# Altium PCB VECTOR.PcbDoc (part 1 of 2)
Units mm, origin at the board's own origin, x right, y up, seen from the top; angles counter-clockwise.
Board outline 152.4 x 101.6 mm, 4 copper layers (Top Layer, VCC, Ground, Bottom Layer), stack 0.778 mm thick; 115 components, 252 nets, 1062 pads, 87 vias.
Unrouted connection lines stored in the file: 78.
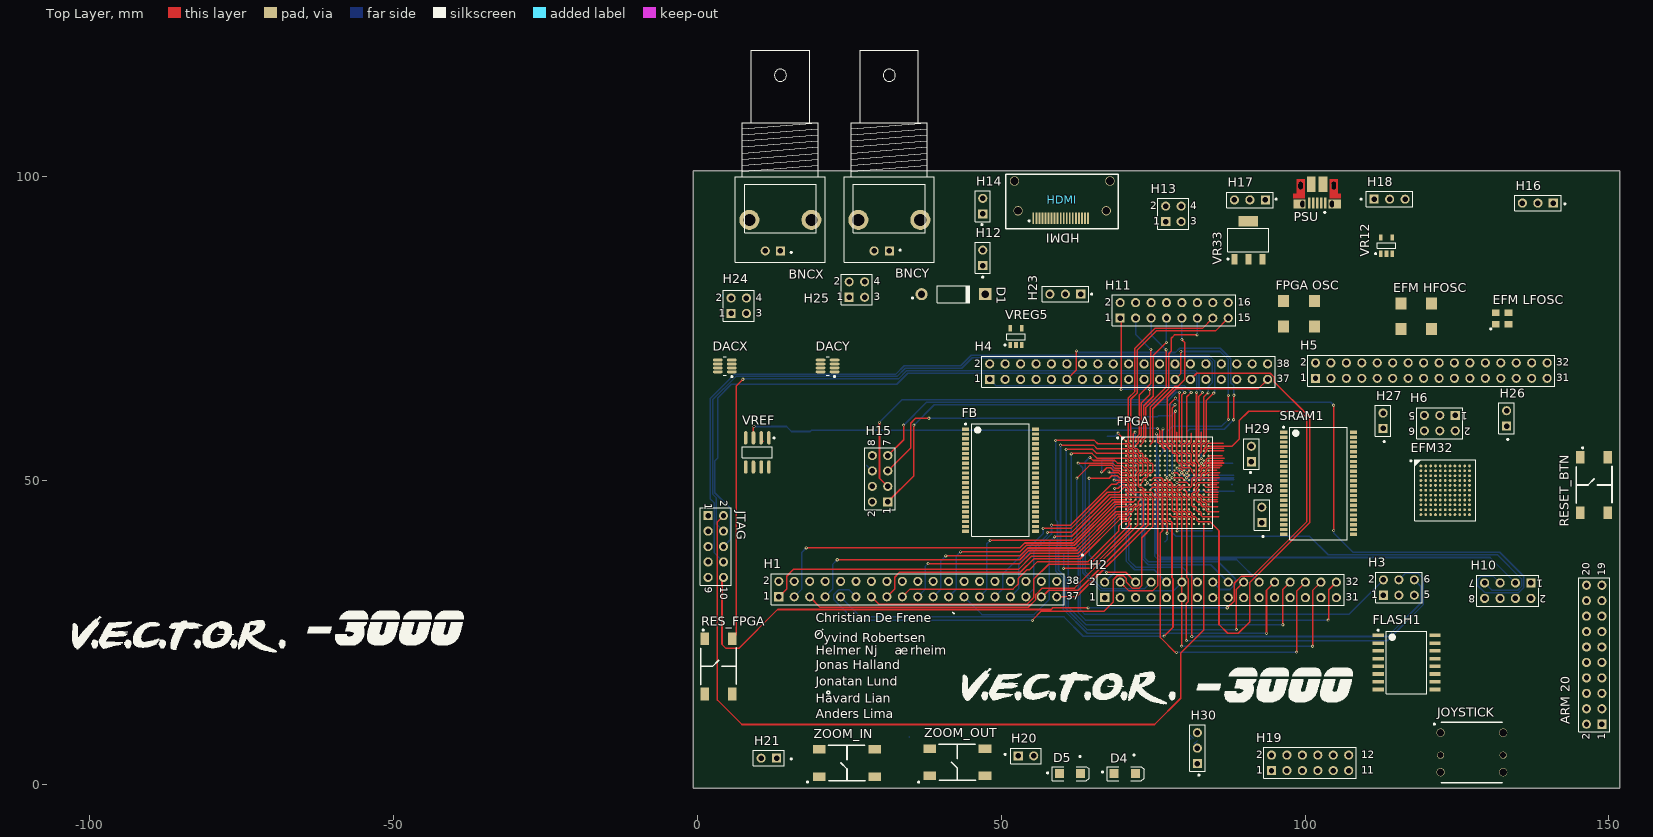
[diagram p0: Top Layer view]
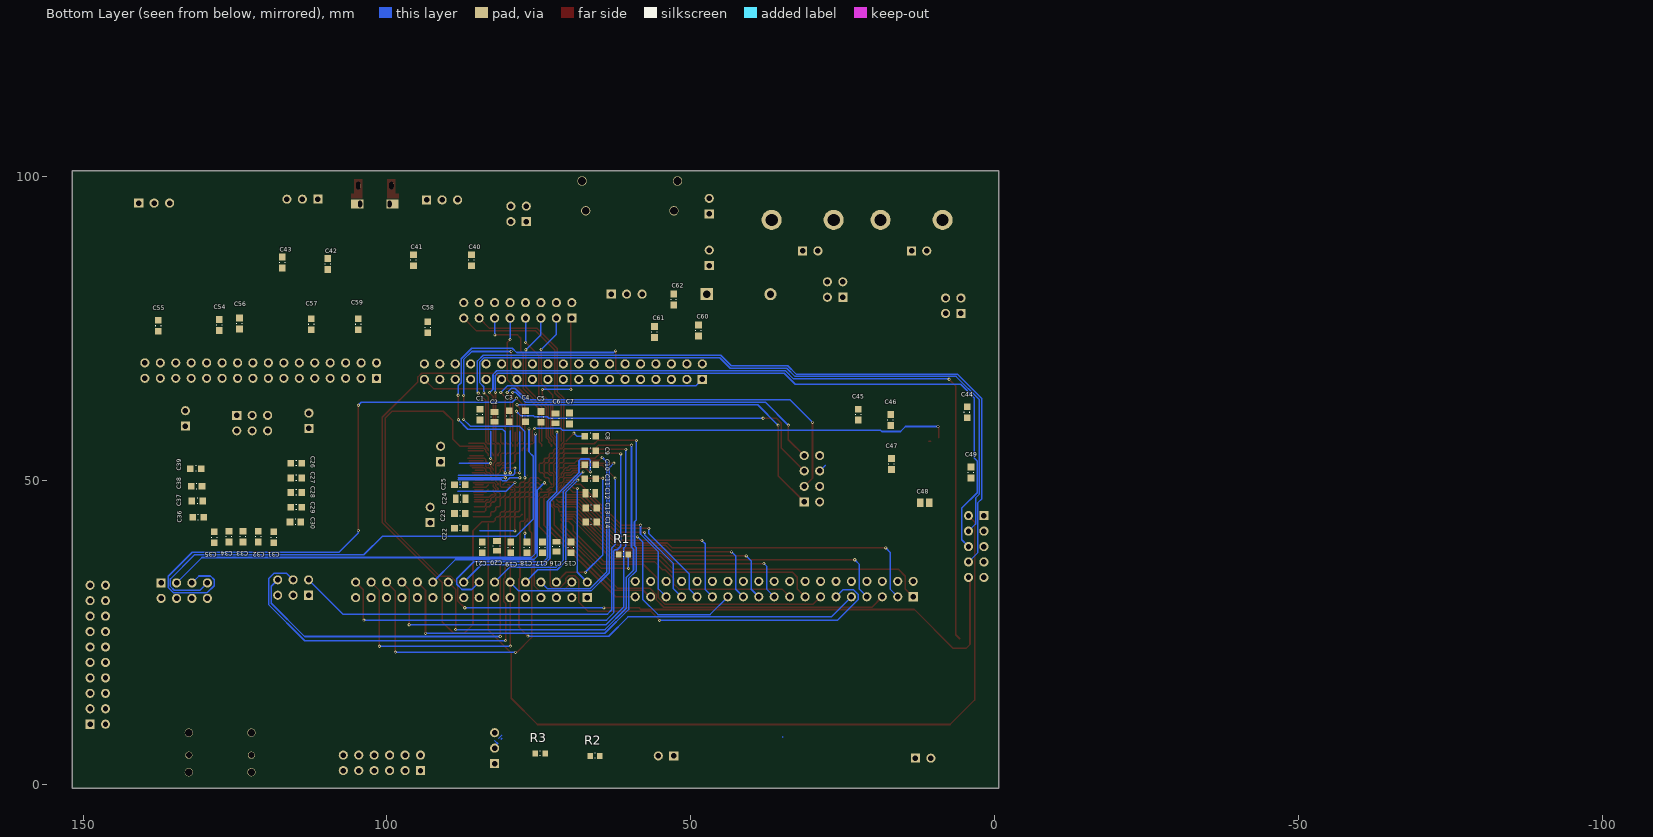
[diagram p1: Bottom Layer view, seen from below]
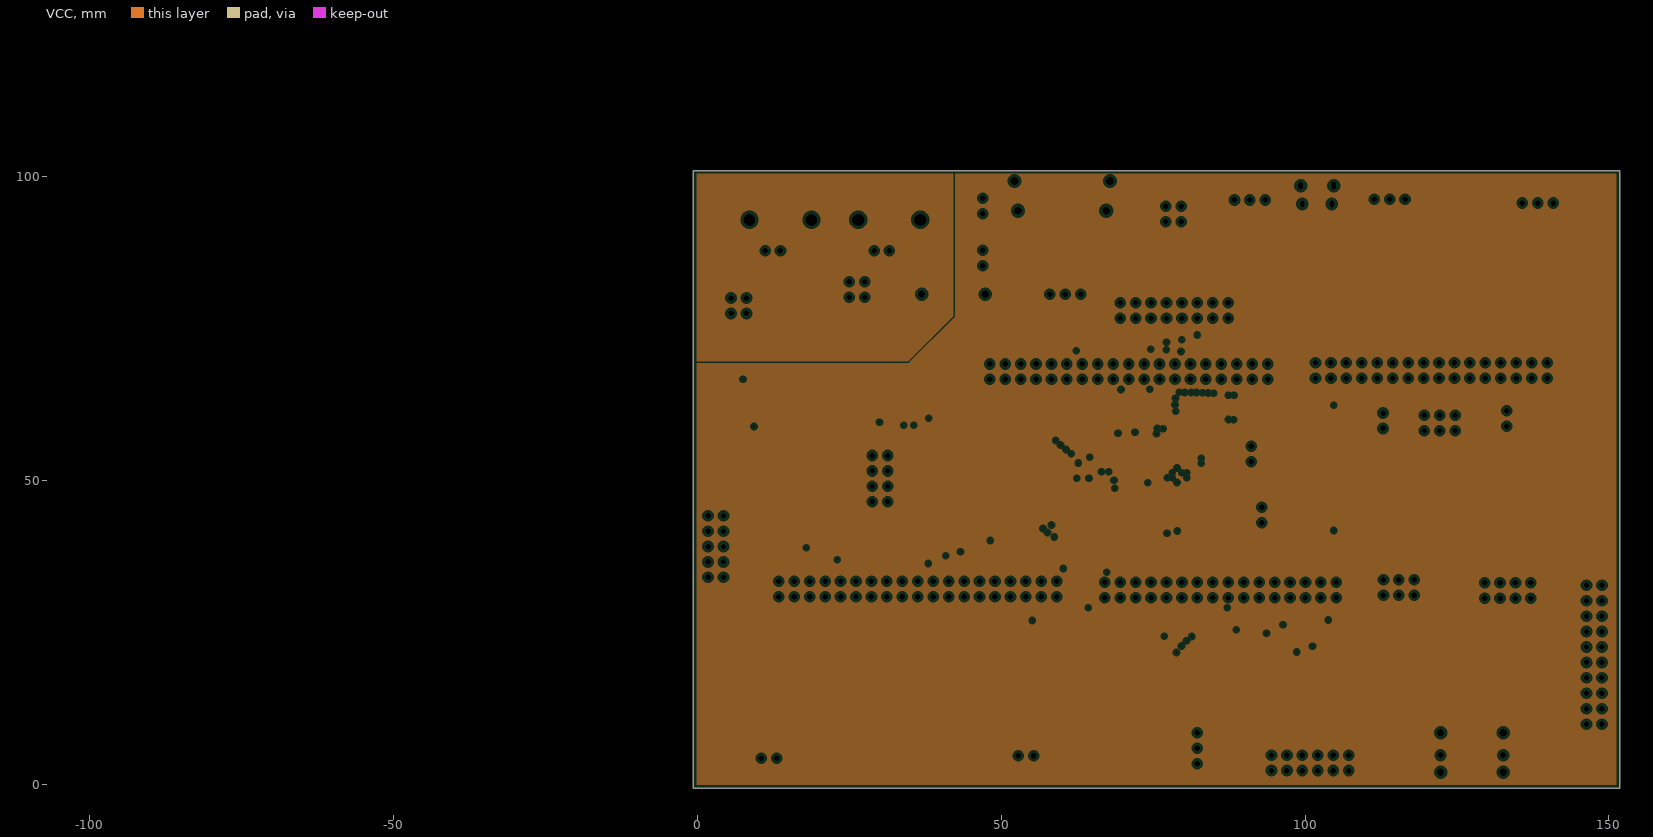
[diagram p2: VCC, clearances drawn from the general rule]
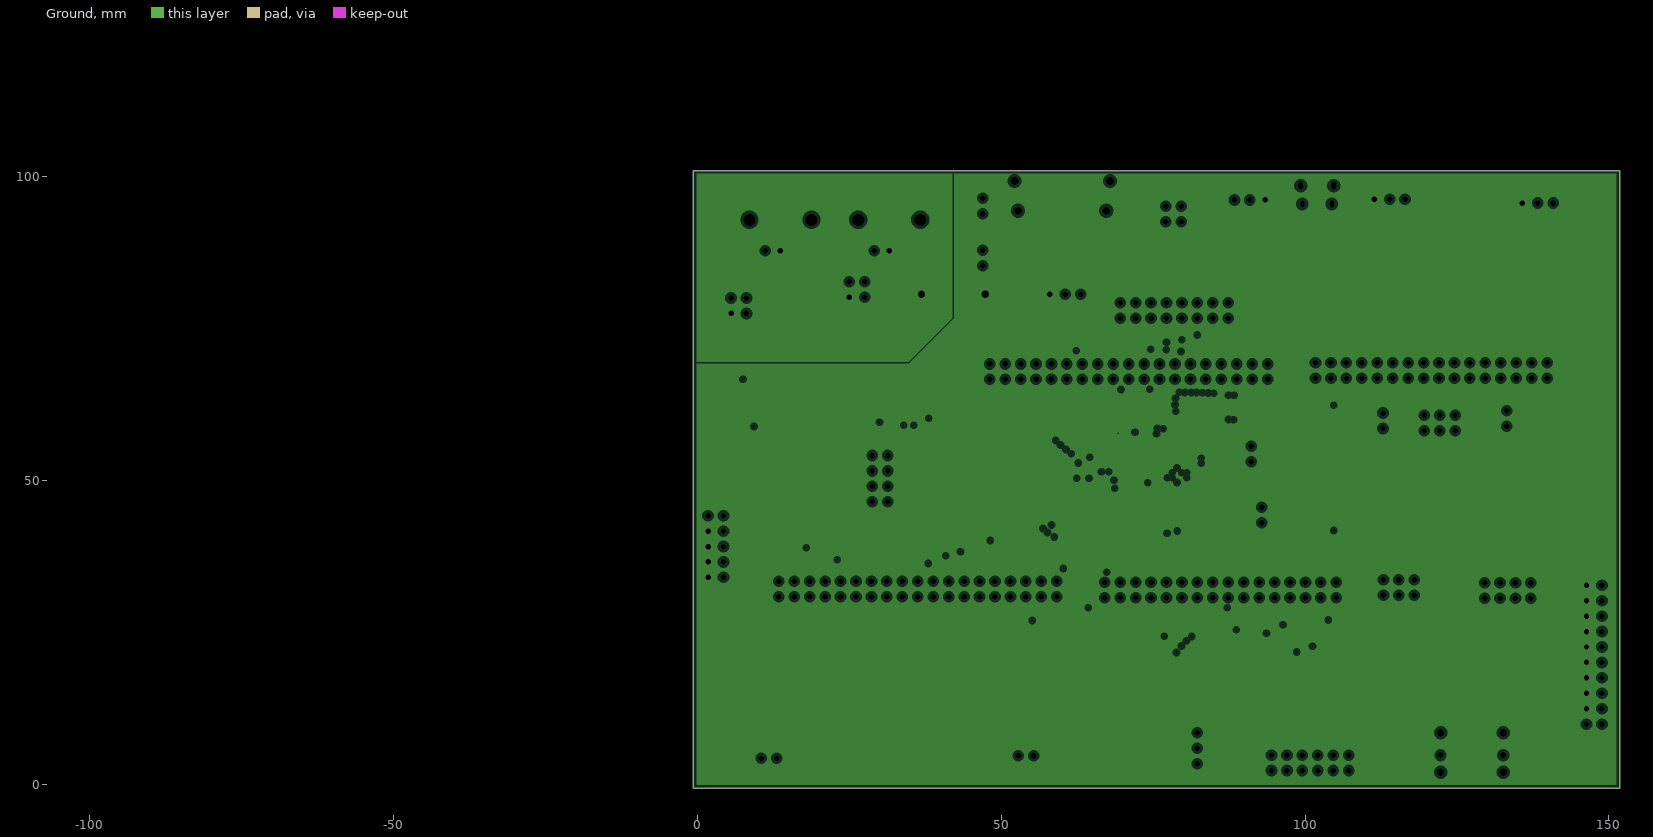
[diagram p3: Ground, clearances drawn from the general rule]

## Layer stack, top to bottom
Top Solder: solder mask 0.0102, Solder Resist, Dk 3.5
Top Layer: signal copper 0.0356
Dielectric 1: core 0.254, FR-4, Dk 4.2
VCC: plane copper 0.036
Dielectric 3: prepreg 0.127, Dk 4.2
Ground: plane copper 0.036, net (Multiple Nets)
Dielectric 2: core 0.254, Dk 4.2
Bottom Layer: signal copper 0.0356
Bottom Solder: solder mask 0.0102, Solder Resist, Dk 3.5

## Board outline
-0.635,-0.635 151.765,-0.635 151.765,100.965 75.692,100.965 -0.635,100.965

## Design rules (kind name [scope] priority, off if disabled: settings)
Clearance Clearance_HDMI [InNetClass('HDMI') vs InNetClass('HDMI')] p1: gap=0.2
Clearance [InNetClass('Non_HDMI') vs InNetClass('Non_HDMI')] p2: gap=0.254
MinimumSolderMaskSliver [All] p1: minsoldermaskwidth=0.1
PlaneClearance [All] p1: clearance=0.508
PlaneConnect [All] p1: planeconnectstyle=Relief reliefexpansion=0.508 reliefentries=4 reliefconductorwidth=0.254 reliefairgap=0.254
PolygonConnect [All] p1: connectstyle=Relief reliefconductorwidth=0.254 reliefentries=4 polygonreliefangle="90 Angle" airgapwidth=0.254
RoutingVias [All] p1: holewidth=0.711 width=1.27 viastyle="Through Hole" minholewidth=0.711 minwidth=1.27 maxholewidth=0.711 maxwidth=1.27
SolderMaskExpansion [All] p1: expansion=0.127
Width Width_Power [InNetClass('Power')] p1: maxlimit=0.508 minlimit=0.508 preferedwidth=0.508
Width Width_Signal [InNetClass('Signal')] p2: maxlimit=0.254 minlimit=0.254 preferedwidth=0.254
Width [All] p3: maxlimit=0.254 minlimit=0.254 preferedwidth=0.254
27 further rules are at their usual default settings.

## Classes and differential pairs
component class SRAM: H4 H5 H6 SRAM1
component class "Power Supply": C40 C41 C42 C43 C60 C61 C62 D4 D5 H16 H17 H18 H23 R2 R3 VR12 VR33 VREG5
component class JoystickButtons: H19 H20 H21 JOYSTICK ZOOM_IN ZOOM_OUT
component class HDMI: H11 H12 H13 H14 HDMI
component class "Frame Buffer": FB H1 H2 H3
component class "FPGA Config": JTAG R1
component class "FPGA Bank 0": FPGA RES_FPGA
component class FPGA_VCC: C1 C2 C3 C4 C5 C6 C7 C8 C9 C10 C11 C12 C13 C14 C15 C16 C17 C18 C19 C20 C21 C22 C23 C24 C25
component class Flash: FLASH1 H10
component class EFM: "ARM 20" C39 EFM32 H29 RESET_BTN
component class "EFM Power": C26 C27 C28 C29 C30 C31 C32 C33 C34 C35 C36 C37 C38
component class DAC: BNCX BNCY C44 C45 C46 C47 C48 C49 D1 DACX DACY H15 H24 H25 H30 VREF
component class Clocks: C54 C55 C56 C57 C58 C59 "EFM HFOSC" "EFM LFOSC" "FPGA OSC" H26 H27 H28
net class EBI.A[0..22]: EBI.A0 EBI.A1 EBI.A2 EBI.A3 EBI.A4 EBI.A5 EBI.A6 EBI.A7 EBI.A8 EBI.A9 EBI.A10 EBI.A11 EBI.A12 EBI.A13 EBI.A14 EBI.A15 EBI.A16 EBI.A17 EBI.A18 EBI.A19 EBI.A20 EBI.A21 EBI.A22
net class EBI.D[0..15]: EBI.D0 EBI.D1 EBI.D2 EBI.D3 EBI.D4 EBI.D5 EBI.D6 EBI.D7 EBI.D8 EBI.D9 EBI.D10 EBI.D11 EBI.D12 EBI.D13 EBI.D14 EBI.D15
net class FB.A[0..18]: FB.A0 FB.A1 FB.A2 FB.A3 FB.A4 FB.A5 FB.A6 FB.A7 FB.A8 FB.A9 FB.A10 FB.A11 FB.A12 FB.A13 FB.A14 FB.A15 FB.A16 FB.A17 FB.A18
net class FB.D[0..15]: FB.D0 FB.D1 FB.D2 FB.D3 FB.D4 FB.D5 FB.D6 FB.D7 FB.D8 FB.D9 FB.D10 FB.D11 FB.D12 FB.D13 FB.D14 FB.D15

## Components (designator, comment, footprint, x,y, rotation, side; value= is the part's Value field where it differs from the comment)
"ARM 20" "ARM 20 Pin Header" HDR2X10 148.844,9.906 r90 top
BNCX "BNC" "BNC_RA CON" 13.716,87.757 r270 top
BNCY "BNC" "BNC_RA CON" 31.623,87.757 r270 top
C1 "4.7uF" CAPC0603(1608)100_M 84.709,60.833 r270 bottom
C2 "100uF" CAPC0805(2012)75_L 82.296,60.452 r270 bottom
C3 "470nF" CAPC0603(1608)100_M 79.883,60.579 r270 bottom
C4 "470nF" CAPC0603(1608)100_M 77.216,60.579 r270 bottom
C5 "4.7uF" CAPC0603(1608)100_M 74.676,60.452 r270 bottom
C6 "100uF" CAPC0805(2012)75_L 72.263,60.198 r90 bottom
C7 "470nF" CAPC0603(1608)100_M 69.977,60.198 r270 bottom
C8 "470nF" CAPC0603(1608)100_M 66.548,57.277 r180 bottom
C9 "470nF" CAPC0603(1608)100_M 66.548,54.864 r180 bottom
C10 "470nF" CAPC0603(1608)100_M 66.548,52.578 r0 bottom
C11 "470nF" CAPC0603(1608)100_M 66.548,50.292 r0 bottom
C12 "100uF" CAPC0805(2012)75_L 66.548,47.879 r0 bottom
C13 "4.7uF" CAPC0603(1608)100_M 66.421,45.466 r0 bottom
C14 "470nF" CAPC0603(1608)100_M 66.421,43.18 r0 bottom
C15 "470nF" CAPC0603(1608)100_M 69.723,38.989 r90 bottom
C16 "100uF" CAPC0805(2012)75_L 72.136,39.116 r90 bottom
C17 "4.7uF" CAPC0603(1608)100_M 74.422,38.989 r90 bottom
C18 "470nF" CAPC0603(1608)100_M 76.962,38.989 r90 bottom
C19 "470nF" CAPC0603(1608)100_M 79.629,38.989 r90 bottom
C20 "100uF" CAPC0805(2012)75_L 81.915,39.243 r90 bottom
C21 "4.7uF" CAPC0603(1608)100_M 84.328,38.989 r90 bottom
C22 "470nF" CAPC0603(1608)100_M 88.011,42.164 r180 bottom
C23 "470nF" CAPC0603(1608)100_M 88.011,44.577 r180 bottom
C24 "100uF" CAPC0805(2012)75_L 87.884,46.99 r180 bottom
C25 "4.7uF" CAPC0603(1608)100_M 88.011,49.276 r180 bottom
C26 "100nF" CAPC0603(1608)100_M 114.935,52.832 r180 bottom
C27 "100nF" CAPC0603(1608)100_M 114.935,50.419 r180 bottom
C28 "100nF" CAPC0603(1608)100_M 114.935,48.006 r180 bottom
C29 "100nF" CAPC0603(1608)100_M 114.935,45.593 r180 bottom
C30 "100nF" CAPC0603(1608)100_M 115.062,43.18 r180 bottom
C31 "100nF" CAPC0603(1608)100_M 118.618,40.64 r270 bottom
C32 "100nF" CAPC0603(1608)100_M 121.158,40.767 r90 bottom
C33 "10uF" CAPC0603(1608)100_M 123.698,40.767 r90 bottom
C34 "100nF" CAPC0603(1608)100_M 125.984,40.767 r90 bottom
C35 "100nF" CAPC0603(1608)100_M 128.397,40.64 r90 bottom
C36 "100nF" CAPC0603(1608)100_M 131.064,43.942 r180 bottom
C37 "1uF" CAPC0603(1608)100_M 131.191,46.609 r180 bottom
C38 "4.7uF" CAPC0603(1608)100_M 131.318,49.022 r180 bottom
C39 "1uF" CAPC0603(1608)100_M 131.445,51.943 r180 bottom
C40 "1uF" CAPC0603(1608)100_M 86.106,86.233 r90 bottom
C41 "1uF" CAPC0603(1608)100_M 95.631,86.233 r90 bottom
C42 "1uF" CAPC0603(1608)100_M 109.728,85.598 r90 bottom
C43 "1uF" CAPC0603(1608)100_M 117.221,85.852 r90 bottom
C44 "1uF" CAPC0603(1608)100_M 4.572,61.214 r90 bottom
C45 "1uF" CAPC0603(1608)100_M 22.479,60.833 r90 bottom
C46 "10uF" CAPC0603(1608)100_M 17.145,59.944 r90 bottom
C47 "100nF" CAPC0603(1608)100_M 17.018,52.705 r90 bottom
C48 "1uF" C0805 11.557,46.355 r0 bottom
C49 "100nF" CAPC0603(1608)100_M 3.937,51.308 r90 bottom
C54 "10nF" CAPC0603(1608)100_M 127.57,75.569 r270 bottom
C55 "15pF" CAPC0603(1608)100_M 137.603,75.442 r270 bottom
C56 "10nF" CAPC0603(1608)100_M 124.268,75.823 r90 bottom
C57 "15pF" CAPC0603(1608)100_M 112.457,75.696 r90 bottom
C58 "10nF" CAPC0603(1608)100_M 93.28,75.188 r90 bottom
C59 "15pF" CAPC0603(1608)100_M 104.71,75.696 r270 bottom
C60 "1uF" CAPC0603(1608)100_M 48.768,74.676 r90 bottom
C61 "4.7uF" CAPC0603(1608)100_M 56.007,74.422 r90 bottom
C62 "4.7uF" CAPC0603(1608)100_M 52.832,79.756 r90 bottom
D1 "Diode 1N4001" DO-41 42.164,80.645 r0 top
D4 "LED2" 3.2X1.6X1.1 70.355,1.77 r0 top
D5 "LED2" 3.2X1.6X1.1 61.345,1.79 r0 top
DACX "AD5061BRJZ-1500RL7" RJ-8_N 4.572,68.834 r180 top
DACY "AD5061BRJZ-1500RL7" RJ-8_N 21.463,68.834 r180 top
EFM32 "EFM32GG990F1024-BGA112" ENMR-BGA112 123.063,48.387 r0 top
"EFM HFOSC" "FXO-HC736R-48" FPGA-OSC 114.87,73.918 r90 top
"EFM LFOSC" "F32K-327" LFOSC-32 131.38,75.696 r90 top
FB "CY7C1051DV33-10ZSXI" TSOP-44-SRAM 49.911,50.038 r0 top
FLASH1 "S25FL129P0XMFI001" SOIC-16-FLASH 116.713,20.066 r0 top
FPGA "XC6SLX45-2CSG324I" CSG324 77.343,49.657 r0 top
"FPGA OSC" "FXO-HC736R-100" FPGA-OSC 95.566,74.299 r90 top
H1 "FB_ADDRESS_HEADER" HDR2X19 13.445,30.865 r0 top
H2 "FB_DATA_HEADER" HDR2X16 67.056,30.734 r0 top
H3 "FB_CONTROL_HEADER" HDR2X3 112.903,31.115 r0 top
H4 "SRAM1_ADDRESS_HEADER" HDR2X19 48.135,66.625 r0 top
H5 "SRAM1_DATA_HEADER" HDR2X16 101.727,66.802 r0 top
H6 "SRAM1_CONTROL_HEADER" HDR2X3 124.714,60.706 r180 top
H10 "FLASH_HEADER" HDR2X4 137.16,33.147 r180 top
H11 "HDMI_HEADER" HDR2X8 69.596,76.708 r0 top
H12 "CEC_HEADER" HDR1X2 46.99,85.344 r90 top
H13 "DDC_HEADER" HDR2X2 77.089,92.583 r0 top
H14 "POWER_HEADER" HDR1X2 46.99,93.853 r90 top
H15 "DAC_HEADER" HDR2X4 31.369,46.482 r90 top
H16 "5V_HEADER" HDR1X3 140.843,95.631 r180 top
H17 "3.3V_HEADER" HDR1X3 93.472,96.139 r180 top
H18 "1.2V_HEADER" HDR1X3 111.379,96.266 r0 top
H19 "JOYSTICK_HEADER" HDR2X6 94.488,2.286 r0 top
H20 "ZOOM_OUT_HEADER" HDR1X2 52.832,4.699 r0 top
H21 "ZOOM_IN_HEADER" HDR1X2 13.081,4.318 r180 top
H23 "5V_DAC_HEADER" HDR1X3 63.119,80.645 r180 top
H24 "Header 2X2" HDR2X2 5.588,77.47 r0 top
H25 "Header 2X2" HDR2X2 25.019,80.137 r0 top
H26 "Header 2" HDR1X2 133.158,58.932 r90 top
H27 "Header 2" HDR1X2 112.838,58.551 r90 top
H28 "Header 2" HDR1X2 92.899,43.057 r90 top
H29 "Header 2" HDR1X2 91.186,53.086 r90 top
H30 "Header 3" HDR1X3 82.296,3.429 r90 top
HDMI "HDMI_connector" HDMI-type-A 67.31,94.361 r180 top
JOYSTICK "SKQUCAA010" 5-WAY-JOYSTICK 122.301,8.509 r0 top
JTAG "Header 5X2" HDR2X5 1.81,44.21 r270 top
PSU "MICRO-USB_CONNECTOR" MICRO-USB 102.005,95.65 r180 top
R1 "4.7kOhm" RESC0603(1608)_N 61.087,37.846 r0 bottom
R2 "39 Ohm" RESC0603(1608)_N 65.786,4.699 r0 bottom
R3 "18 Ohm" RESC0603(1608)_N 74.803,5.08 r0 bottom
RES_FPGA "FSM2JSMA" Button 1.27,14.859 r0 top
RESET_BTN "FSM2JSMA" Button 145.288,44.704 r0 top
SRAM1 "CY7C1051DV33-10ZSXI" TSOP-44-SRAM 102.235,49.53 r0 top
VR12 "ADP170AUJZ-1.2-r7" VREG-1.2 113.411,88.646 r90 top
VR33 "ADP3339AKCZ-3.3-r7" VREG-3.3 90.678,89.535 r90 top
VREF "REF195GSZ-REEL7" ADI-R-8_N 9.906,54.61 r270 top
VREG5 "LP2992AIM5-5.0/NOPB" VREG-5 52.451,73.66 r90 top
ZOOM_IN "FSM2JSMA" Button 29.21,1.27 r90 top
ZOOM_OUT "FSM2JSMA" Button 47.371,1.397 r90 top

## Footprints (in the part's own frame and the unit in brackets; to place one, negate y for a bottom-side part, rotate by r counter-clockwise, add the part's x,y. Pads: shape width x height; smd on the part's side, far side on the other; paste and mask are expansions set on the pad)
3.2X1.6X1.1 [mm] "SMT LED; 2 Flat Leads"
  rect 1.5x1.5 smd: 1(-1.75,0) 2(1.75,0)
  silkscreen extent -2.9,-1.15 3.2,1.15
5-WAY-JOYSTICK [mm]
  oval 1.34x1.35 hole 1.2: 1(0,0) 3(0,-6.5) 4(10.3,-6.5) 6(10.3,0)
  round 1.15 hole 1: 2(0,-3.7) 5(10.3,-3.7)
  silkscreen extent 0.15,-8.25 10.15,1.75
ADI-R-8_N [mm] "SOIC, 8-Leads, Body 4.9x3.9mm, Pitch 1.27mm, IPC Medium Density"
  oval 2.2x0.6 smd: 1(-2.4,1.905) 2(-2.4,0.635) 3(-2.4,-0.635) 4(-2.4,-1.905) 5(2.4,-1.905) 6(2.4,-0.635) 7(2.4,0.635) 8(2.4,1.905)
  silkscreen extent -2.52,-2.5 0.9,2.88, body extent -2,-2.5 2,2.5, height 1.75
"BNC_RA CON" [mm] "Connector; BNC Elbow"
  rect 1.5x1.5 hole 0.9: 1(0,0)
  round 3.3 hole 2: 2(-5.1,5.1) 2(-5.1,-5.1)
  round 1.5 hole 0.9: 2(0,-2.5)
  silkscreen extent -33,-7.4 1.9,7.4
Button [mm] "copied from 256 SoG"
  rect 1.4x2.1 smd: 1(0,9.1) 2(0,0) 3(4.5,9.1) 4(4.5,0)
  silkscreen extent -0.7,1.55 5.21,7.62
C0805 [mm] "Chip Capacitor, Body 2.0x1.3mm, IPC High Density"
  rect 1.1x1.4 smd: 1(-0.75,0) 2(0.75,0)
  body extent -1.1,-0.72 1.1,0.72, height 1.4
CAPC0603(1608)100_M [mm] "Chip Capacitor, Body 1.6x0.8mm, Height 1.0mm, IPC Low Density"
  rect 1.1x1.1 smd: 1(-0.9,0) 2(0.9,0)
  silkscreen extent -0.05,-0.45 0.05,0.45, body extent -0.87,-0.47 0.88,0.48, height 1
CAPC0805(2012)75_L [mm] "Chip Capacitor, Body 2.0x1.2mm, Height 0.75mm, IPC High Density"
  rect 0.95x1.35 smd: 1(-0.8,0) 2(0.8,0)
  silkscreen extent -0.05,-0.58 0.05,0.58, body extent -1.1,-0.72 1.1,0.72, height 0.75
CSG324 [mm] "BGA, 324-Leads, Body 15x15mm, Pitch 0.8mm"
  round 0.36 smd: A1(-6.8,6.8) A2(-6,6.8) A3(-5.2,6.8) A4(-4.4,6.8) A5(-3.6,6.8) A6(-2.8,6.8) A7(-2,6.8) A8(-1.2,6.8) A9(-0.4,6.8) A10(0.4,6.8) A11(1.2,6.8) A12(2,6.8) A13(2.8,6.8) A14(3.6,6.8) A15(4.4,6.8) A16(5.2,6.8) A17(6,6.8) A18(6.8,6.8) B1(-6.8,6) B2(-6,6) B3(-5.2,6) B4(-4.4,6) B5(-3.6,6) B6(-2.8,6) B7(-2,6) B8(-1.2,6) B9(-0.4,6) B10(0.4,6) B11(1.2,6) B12(2,6) B13(2.8,6) B14(3.6,6) B15(4.4,6) B16(5.2,6) B17(6,6) B18(6.8,6) C1(-6.8,5.2) C2(-6,5.2) C3(-5.2,5.2) C4(-4.4,5.2) C5(-3.6,5.2) C6(-2.8,5.2) C7(-2,5.2) C8(-1.2,5.2) C9(-0.4,5.2) C10(0.4,5.2) C11(1.2,5.2) C12(2,5.2) C13(2.8,5.2) C14(3.6,5.2) C15(4.4,5.2) C16(5.2,5.2) C17(6,5.2) C18(6.8,5.2) D1(-6.8,4.4) D2(-6,4.4) D3(-5.2,4.4) D4(-4.4,4.4) D5(-3.6,4.4) D6(-2.8,4.4) D7(-2,4.4) D8(-1.2,4.4) D9(-0.4,4.4) D10(0.4,4.4) D11(1.2,4.4) D12(2,4.4) D13(2.8,4.4) D14(3.6,4.4) D15(4.4,4.4) D16(5.2,4.4) D17(6,4.4) D18(6.8,4.4) E1(-6.8,3.6) E2(-6,3.6) E3(-5.2,3.6) E4(-4.4,3.6) E5(-3.6,3.6) E6(-2.8,3.6) E7(-2,3.6) E8(-1.2,3.6) E9(-0.4,3.6) E10(0.4,3.6) E11(1.2,3.6) E12(2,3.6) E13(2.8,3.6) E14(3.6,3.6) E15(4.4,3.6) E16(5.2,3.6) E17(6,3.6) E18(6.8,3.6) F1(-6.8,2.8) F2(-6,2.8) F3(-5.2,2.8) F4(-4.4,2.8) F5(-3.6,2.8) F6(-2.8,2.8) F7(-2,2.8) F8(-1.2,2.8) F9(-0.4,2.8) F10(0.4,2.8) F11(1.2,2.8) F12(2,2.8) F13(2.8,2.8) F14(3.6,2.8) F15(4.4,2.8) F16(5.2,2.8) F17(6,2.8) F18(6.8,2.8) G1(-6.8,2) G2(-6,2) G3(-5.2,2) G4(-4.4,2) G5(-3.6,2) G6(-2.8,2) G7(-2,2) G8(-1.2,2) G9(-0.4,2) G10(0.4,2) G11(1.2,2) G12(2,2) G13(2.8,2) G14(3.6,2) G15(4.4,2) G16(5.2,2) G17(6,2) G18(6.8,2) H1(-6.8,1.2) H2(-6,1.2) H3(-5.2,1.2) H4(-4.4,1.2) H5(-3.6,1.2) H6(-2.8,1.2) H7(-2,1.2) H8(-1.2,1.2) H9(-0.4,1.2) H10(0.4,1.2) H11(1.2,1.2) H12(2,1.2) H13(2.8,1.2) H14(3.6,1.2) H15(4.4,1.2) H16(5.2,1.2) H17(6,1.2) H18(6.8,1.2) J1(-6.8,0.4) J2(-6,0.4) J3(-5.2,0.4) J4(-4.4,0.4) J5(-3.6,0.4) J6(-2.8,0.4) J7(-2,0.4) J8(-1.2,0.4) J9(-0.4,0.4) J10(0.4,0.4) J11(1.2,0.4) J12(2,0.4) J13(2.8,0.4) J14(3.6,0.4) J15(4.4,0.4) J16(5.2,0.4) J17(6,0.4) J18(6.8,0.4) K1(-6.8,-0.4) K2(-6,-0.4) K3(-5.2,-0.4) K4(-4.4,-0.4) K5(-3.6,-0.4) K6(-2.8,-0.4) K7(-2,-0.4) K8(-1.2,-0.4) K9(-0.4,-0.4) K10(0.4,-0.4) K11(1.2,-0.4) K12(2,-0.4) K13(2.8,-0.4) K14(3.6,-0.4) K15(4.4,-0.4) K16(5.2,-0.4) K17(6,-0.4) K18(6.8,-0.4) L1(-6.8,-1.2) L2(-6,-1.2) L3(-5.2,-1.2) L4(-4.4,-1.2) L5(-3.6,-1.2) L6(-2.8,-1.2) L7(-2,-1.2) L8(-1.2,-1.2) L9(-0.4,-1.2) L10(0.4,-1.2) L11(1.2,-1.2) L12(2,-1.2) L13(2.8,-1.2) L14(3.6,-1.2) L15(4.4,-1.2) L16(5.2,-1.2) L17(6,-1.2) L18(6.8,-1.2) M1(-6.8,-2) M2(-6,-2) M3(-5.2,-2) M4(-4.4,-2) M5(-3.6,-2) M6(-2.8,-2) M7(-2,-2) M8(-1.2,-2) M9(-0.4,-2) M10(0.4,-2) M11(1.2,-2) M12(2,-2) M13(2.8,-2) M14(3.6,-2) M15(4.4,-2) M16(5.2,-2) M17(6,-2) M18(6.8,-2) N1(-6.8,-2.8) N2(-6,-2.8) N3(-5.2,-2.8) N4(-4.4,-2.8) N5(-3.6,-2.8) N6(-2.8,-2.8) N7(-2,-2.8) N8(-1.2,-2.8) N9(-0.4,-2.8) N10(0.4,-2.8) N11(1.2,-2.8) N12(2,-2.8) N13(2.8,-2.8) N14(3.6,-2.8) N15(4.4,-2.8) N16(5.2,-2.8) N17(6,-2.8) N18(6.8,-2.8) P1(-6.8,-3.6) P2(-6,-3.6) P3(-5.2,-3.6) P4(-4.4,-3.6) P5(-3.6,-3.6) P6(-2.8,-3.6) P7(-2,-3.6) P8(-1.2,-3.6) P9(-0.4,-3.6) P10(0.4,-3.6) P11(1.2,-3.6) P12(2,-3.6) P13(2.8,-3.6) P14(3.6,-3.6) P15(4.4,-3.6) P16(5.2,-3.6) P17(6,-3.6) P18(6.8,-3.6) R1(-6.8,-4.4) R2(-6,-4.4) R3(-5.2,-4.4) R4(-4.4,-4.4) R5(-3.6,-4.4) R6(-2.8,-4.4) R7(-2,-4.4) R8(-1.2,-4.4) R9(-0.4,-4.4) R10(0.4,-4.4) R11(1.2,-4.4) R12(2,-4.4) R13(2.8,-4.4) R14(3.6,-4.4) R15(4.4,-4.4) R16(5.2,-4.4) R17(6,-4.4) R18(6.8,-4.4) T1(-6.8,-5.2) T2(-6,-5.2) T3(-5.2,-5.2) T4(-4.4,-5.2) T5(-3.6,-5.2) T6(-2.8,-5.2) T7(-2,-5.2) T8(-1.2,-5.2) T9(-0.4,-5.2) T10(0.4,-5.2) T11(1.2,-5.2) T12(2,-5.2) T13(2.8,-5.2) T14(3.6,-5.2) T15(4.4,-5.2) T16(5.2,-5.2) T17(6,-5.2) T18(6.8,-5.2) U1(-6.8,-6) U2(-6,-6) U3(-5.2,-6) U4(-4.4,-6) U5(-3.6,-6) U6(-2.8,-6) U7(-2,-6) U8(-1.2,-6) U9(-0.4,-6) U10(0.4,-6) U11(1.2,-6) U12(2,-6) U13(2.8,-6) U14(3.6,-6) U15(4.4,-6) U16(5.2,-6) U17(6,-6) U18(6.8,-6) V1(-6.8,-6.8) V2(-6,-6.8) V3(-5.2,-6.8) V4(-4.4,-6.8) V5(-3.6,-6.8) V6(-2.8,-6.8) V7(-2,-6.8) V8(-1.2,-6.8) V9(-0.4,-6.8) V10(0.4,-6.8) V11(1.2,-6.8) V12(2,-6.8) V13(2.8,-6.8) V14(3.6,-6.8) V15(4.4,-6.8) V16(5.2,-6.8) V17(6,-6.8) V18(6.8,-6.8)
  silkscreen extent -8.27,-7.5 7.5,7.5, body extent -7.5,-7.5 7.5,7.5, height 1.5
DO-41 [mm] "Diode, Axial; Body 5.2 x 2.7 mm (LxDia. max), Lead Dia. 0.86 mm (max)"
  round 2 hole 1.2: 1(-5.23,0)
  rect 2x2 hole 1.2: 2(5.23,0)
  silkscreen extent -2.65,-1.4 2.75,1.4
ENMR-BGA112 [mm] "BGA, 112-Balls, Body 10x10mm, Pitch 0.8mm"
  round 0.45 smd: A1(-4,4) A2(-3.2,4) A3(-2.4,4) A4(-1.6,4) A5(-0.8,4) A6(0,4) A7(0.8,4) A8(1.6,4) A9(2.4,4) A10(3.2,4) A11(4,4) B1(-4,3.2) B2(-3.2,3.2) B3(-2.4,3.2) B4(-1.6,3.2) B5(-0.8,3.2) B6(0,3.2) B7(0.8,3.2) B8(1.6,3.2) B9(2.4,3.2) B10(3.2,3.2) B11(4,3.2) C1(-4,2.4) C2(-3.2,2.4) C3(-2.4,2.4) C4(-1.6,2.4) C5(-0.8,2.4) C6(0,2.4) C7(0.8,2.4) C8(1.6,2.4) C9(2.4,2.4) C10(3.2,2.4) C11(4,2.4) D1(-4,1.6) D2(-3.2,1.6) D3(-2.4,1.6) D4(-1.6,1.6) D5(-0.8,1.6) D6(0,1.6) D7(0.8,1.6) D8(1.6,1.6) D9(2.4,1.6) D10(3.2,1.6) D11(4,1.6) E1(-4,0.8) E2(-3.2,0.8) E3(-2.4,0.8) E4(-1.6,0.8) E5(-0.8,0.8) E6(0,0.8) E7(0.8,0.8) E8(1.6,0.8) E9(2.4,0.8) E10(3.2,0.8) E11(4,0.8) F1(-4,0) F2(-3.2,0) F3(-2.4,0) F4(-1.6,0) F5(-0.8,0) F6(0,0) F7(0.8,0) F8(1.6,0) F9(2.4,0) F10(3.2,0) F11(4,0) G1(-4,-0.8) G2(-3.2,-0.8) G3(-2.4,-0.8) G4(-1.6,-0.8) G5(-0.8,-0.8) G6(0,-0.8) G7(0.8,-0.8) G8(1.6,-0.8) G9(2.4,-0.8) G10(3.2,-0.8) G11(4,-0.8) H1(-4,-1.6) H2(-3.2,-1.6) H3(-2.4,-1.6) H4(-1.6,-1.6) H5(-0.8,-1.6) H6(0,-1.6) H7(0.8,-1.6) H8(1.6,-1.6) H9(2.4,-1.6) H10(3.2,-1.6) H11(4,-1.6) J1(-4,-2.4) J2(-3.2,-2.4) J3(-2.4,-2.4) J4(-1.6,-2.4) J5(-0.8,-2.4) J6(0,-2.4) J7(0.8,-2.4) J8(1.6,-2.4) J9(2.4,-2.4) J10(3.2,-2.4) J11(4,-2.4) K1(-4,-3.2) K2(-3.2,-3.2) K3(-2.4,-3.2) K4(-1.6,-3.2) K5(-0.8,-3.2) K6(0,-3.2) K7(0.8,-3.2) K8(1.6,-3.2) K9(2.4,-3.2) K10(3.2,-3.2) K11(4,-3.2) L1(-4,-4) L2(-3.2,-4) L3(-2.4,-4) L4(-1.6,-4) L5(-0.8,-4) L6(0,-4) L7(0.8,-4) L8(1.6,-4) L9(2.4,-4) L10(3.2,-4) L11(4,-4)
  silkscreen extent -5.77,-5 5,5, body extent -5,-5 5,5, height 1.3
FPGA-OSC [mm]
  rect 2x1.8 smd: 1(1.016,-0.889) 2(1.016,-5.969) 3(5.216,-5.969) 4(5.216,-0.889)
  round 0.3 on Top Overlay: 3(-0.381,0.508)
HDMI-type-A [mm]
  rect 0.3x1.9 smd: 1(12,1.2) 2(11.5,1.2) 3(11,1.2) 4(10.5,1.2) 5(10,1.2) 6(9.5,1.2) 7(9,1.2) 8(8.5,1.2) 9(8,1.2) 10(7.5,1.2) 11(7,1.2) 12(6.5,1.2) 13(6,1.2) 14(5.5,1.2) 15(5,1.2) 16(4.5,1.2) 17(4,1.2) 18(3.5,1.2) 19(3,1.2)
  round 1.524 hole 1.3: ""(-0.6,-4.9) ""(0,0) ""(14.5,0) ""(15.1,-4.9)
  silkscreen extent -1.95,-6.01 16.52,2.97
HDR1X2 [mm] "Connector; Header; 2 Position"
  rect 1.5x1.5 hole 0.9: 1(0,0)
  round 1.5 hole 0.9: 2(2.54,0)
  silkscreen extent -1.27,-1.27 3.81,1.27
HDR1X3 [mm] "Connector; Header; 3 Position"
  rect 1.5x1.5 hole 0.9: 1(0,0)
  round 1.5 hole 0.9: 2(2.54,0) 3(5.08,0)
  silkscreen extent -1.27,-1.27 6.35,1.27
HDR2X2 [mm] "Connector; Header; 2x2 Position"
  rect 1.5x1.5 hole 0.9: 1(0,0)
  round 1.5 hole 0.9: 2(0,2.54) 3(2.54,0) 4(2.54,2.54)
  silkscreen extent -1.27,-1.27 3.81,3.81
HDR2X3 [mm] "Connector; Header; 3x2 Position"
  rect 1.5x1.5 hole 0.9: 1(0,0)
  round 1.5 hole 0.9: 2(0,2.54) 3(2.54,0) 4(2.54,2.54) 5(5.08,0) 6(5.08,2.54)
  silkscreen extent -1.27,-1.27 6.35,3.81
HDR2X4 [mm] "Connector; Header; 4x2 Position"
  rect 1.5x1.5 hole 0.9: 1(0,0)
  round 1.5 hole 0.9: 2(0,2.54) 3(2.54,0) 4(2.54,2.54) 5(5.08,0) 6(5.08,2.54) 7(7.62,0) 8(7.62,2.54)
  silkscreen extent -1.27,-1.27 8.89,3.81
HDR2X5 [mm] "Connector; Header; 5x2 Position"
  rect 1.5x1.5 hole 0.9: 1(0,0)
  round 1.5 hole 0.9: 2(0,2.54) 3(2.54,0) 4(2.54,2.54) 5(5.08,0) 6(5.08,2.54) 7(7.62,0) 8(7.62,2.54) 9(10.16,0) 10(10.16,2.54)
  silkscreen extent -1.27,-1.27 11.43,3.81
HDR2X6 [mm] "Connector; Header; 6x2 Position"
  rect 1.5x1.5 hole 0.9: 1(0,0)
  round 1.5 hole 0.9: 2(0,2.54) 3(2.54,0) 4(2.54,2.54) 5(5.08,0) 6(5.08,2.54) 7(7.62,0) 8(7.62,2.54) 9(10.16,0) 10(10.16,2.54) 11(12.7,0) 12(12.7,2.54)
  silkscreen extent -1.27,-1.27 13.97,3.81
HDR2X8 [mm] "Connector; Header; 8x2 Position"
  rect 1.5x1.5 hole 0.9: 1(0,0)
  round 1.5 hole 0.9: 2(0,2.54) 3(2.54,0) 4(2.54,2.54) 5(5.08,0) 6(5.08,2.54) 7(7.62,0) 8(7.62,2.54) 9(10.16,0) 10(10.16,2.54) 11(12.7,0) 12(12.7,2.54) 13(15.24,0) 14(15.24,2.54) 15(17.78,0) 16(17.78,2.54)
  silkscreen extent -1.27,-1.27 19.05,3.81
HDR2X10 [mm] "Connector; Header; 10x2 Position"
  rect 1.5x1.5 hole 0.9: 1(0,0)
  round 1.5 hole 0.9: 2(0,2.54) 3(2.54,0) 4(2.54,2.54) 5(5.08,0) 6(5.08,2.54) 7(7.62,0) 8(7.62,2.54) 9(10.16,0) 10(10.16,2.54) 11(12.7,0) 12(12.7,2.54) 13(15.24,0) 14(15.24,2.54) 15(17.78,0) 16(17.78,2.54) 17(20.32,0) 18(20.32,2.54) 19(22.86,0) 20(22.86,2.54)
  silkscreen extent -1.27,-1.27 24.13,3.81
HDR2X16 [mm] "Connector; Header; 16x2 Position"
  rect 1.5x1.5 hole 0.9: 1(0,0)
  round 1.5 hole 0.9: 2(0,2.54) 3(2.54,0) 4(2.54,2.54) 5(5.08,0) 6(5.08,2.54) 7(7.62,0) 8(7.62,2.54) 9(10.16,0) 10(10.16,2.54) 11(12.7,0) 12(12.7,2.54) 13(15.24,0) 14(15.24,2.54) 15(17.78,0) 16(17.78,2.54) 17(20.32,0) 18(20.32,2.54) 19(22.86,0) 20(22.86,2.54) 21(25.4,0) 22(25.4,2.54) 23(27.94,0) 24(27.94,2.54) 25(30.48,0) 26(30.48,2.54) 27(33.02,0) 28(33.02,2.54) 29(35.56,0) 30(35.56,2.54) 31(38.1,0) 32(38.1,2.54)
  silkscreen extent -1.27,-1.27 39.37,3.81
HDR2X19 [mm] "Connector; Header; 19x2 Position"
  rect 1.5x1.5 hole 0.9: 1(0,0)
  round 1.5 hole 0.9: 2(0,2.54) 3(2.54,0) 4(2.54,2.54) 5(5.08,0) 6(5.08,2.54) 7(7.62,0) 8(7.62,2.54) 9(10.16,0) 10(10.16,2.54) 11(12.7,0) 12(12.7,2.54) 13(15.24,0) 14(15.24,2.54) 15(17.78,0) 16(17.78,2.54) 17(20.32,0) 18(20.32,2.54) 19(22.86,0) 20(22.86,2.54) 21(25.4,0) 22(25.4,2.54) 23(27.94,0) 24(27.94,2.54) 25(30.48,0) 26(30.48,2.54) 27(33.02,0) 28(33.02,2.54) 29(35.56,0) 30(35.56,2.54) 31(38.1,0) 32(38.1,2.54) 33(40.64,0) 34(40.64,2.54) 35(43.18,0) 36(43.18,2.54) 37(45.72,0) 38(45.72,2.54)
  silkscreen extent -1.27,-1.27 46.99,3.81
LFOSC-32 [mm]
  rect 1.1x1.3 smd: 1(0,0) 2(0,-2.1) 3(1.9,-2.1) 4(1.9,0)
MICRO-USB [mm]
  rect 0.4x1.75 smd: 1(-1.3,0) 2(-0.65,0) 3(0,0) 4(0.65,0) 5(1.3,0)
  oval 0.7x1.2 hole 0.7 slot 1.2 at 90 deg unplated: ""(-2.725,-2.855) ""(2.725,-2.855)
  rect 2x1.4 hole 0.65 slot 1.05 at 90 deg unplated copper offset -0.475,0: ""(-2.425,0.175)
  rect 1.425x2.5 smd: ""(-0.963,-3.075) ""(0.962,-3.075)
  rect 2x1.4 hole 0.65 slot 1.05 at 90 deg unplated copper offset 0.475,0: ""(2.425,0.175)
  Top Layer region: -3.9,-1.475 -3.375,-1.475 -3.375,-3.925 -2.075,-3.925 -2.075,-0.775 -3.9,-0.775
  Top Layer region: 3.9,-1.475 3.375,-1.475 3.375,-3.925 2.075,-3.925 2.075,-0.775 3.9,-0.775
RESC0603(1608)_N [mm] "Chip Resistor, Body 1.6x0.8mm, IPC Medium Density"
  rect 0.9x1 smd: 1(-0.8,0) 2(0.8,0)
  silkscreen extent -0.05,-0.4 0.05,0.4, body extent -0.85,-0.47 0.85,0.47, height 0.6
RJ-8_N [mm] "SOP, 8-Leads, Body 2.9x1.6mm, Pitch 0.65mm, IPC Medium Density"
  oval 1.6x0.45 smd: 1(-1.15,0.975) 2(-1.15,0.325) 3(-1.15,-0.325) 4(-1.15,-0.975) 5(1.15,-0.975) 6(1.15,-0.325) 7(1.15,0.325) 8(1.15,0.975)
  silkscreen extent -1.28,-1.5 0.25,1.87, body extent -0.85,-1.5 0.85,1.5, height 1.45
SOIC-16-FLASH [mm] "SOIC, 16-Leads, Body 10.30x7.50mm, Pitch 1.27mm, IPC Medium Density"
  rect 1.85x0.6 smd: 1(-4.675,4.445) 2(-4.675,3.175) 3(-4.675,1.905) 4(-4.675,0.635) 5(-4.675,-0.635) 6(-4.675,-1.905) 7(-4.675,-3.175) 8(-4.675,-4.445) 9(4.675,-4.445) 10(4.675,-3.175) 11(4.675,-1.905) 12(4.675,-0.635) 13(4.675,0.635) 14(4.675,1.905) 15(4.675,3.175) 16(4.675,4.445)
  silkscreen extent -4.8,-5.15 3.35,5.42, body extent -3.75,-5.15 3.75,5.15, height 2.65
TSOP-44-SRAM [mm] "TSOP, 44-Leads, Body 18.41x10.16mm, Pitch 0.80mm, IPC Medium Density"
  rect 1.2x0.55 smd: 1(-5.75,8.4) 2(-5.75,7.6) 3(-5.75,6.8) 4(-5.75,6) 5(-5.75,5.2) 6(-5.75,4.4) 7(-5.75,3.6) 8(-5.75,2.8) 9(-5.75,2) 10(-5.75,1.2) 11(-5.75,0.4) 12(-5.75,-0.4) 13(-5.75,-1.2) 14(-5.75,-2) 15(-5.75,-2.8) 16(-5.75,-3.6) 17(-5.75,-4.4) 18(-5.75,-5.2) 19(-5.75,-6) 20(-5.75,-6.8) 21(-5.75,-7.6) 22(-5.75,-8.4) 23(5.75,-8.4) 24(5.75,-7.6) 25(5.75,-6.8) 26(5.75,-6) 27(5.75,-5.2) 28(5.75,-4.4) 29(5.75,-3.6) 30(5.75,-2.8) 31(5.75,-2) 32(5.75,-1.2) 33(5.75,-0.4) 34(5.75,0.4) 35(5.75,1.2) 36(5.75,2) 37(5.75,2.8) 38(5.75,3.6) 39(5.75,4.4) 40(5.75,5.2) 41(5.75,6) 42(5.75,6.8) 43(5.75,7.6) 44(5.75,8.4)
  silkscreen extent -5.87,-9.25 4.75,9.35, body extent -5.15,-9.25 5.15,9.25, height 1.2
VREG-1.2 [mm] "SOT23, 5-Leads, Body 2.90x2.80mm, Pitch 0.95mm, IPC Medium Density"
  rect 1x0.6 smd: 1(-1.35,0.95) 2(-1.35,0) 3(-1.35,-0.95) 4(1.35,-0.95) 5(1.35,0.95)
  silkscreen extent -1.47,-1.5 0.45,1.92, body extent -0.85,-1.5 0.85,1.5, height 1
VREG-3.3 [mm] "SOT223, 4-Leads, Body 6.50x7.00mm (avg), Pitch 2.30mm, IPC Medium Density"
  rect 1.75x1 smd: 1(-3.125,2.3) 2(-3.125,0) 3(-3.125,-2.3)
  rect 1.75x3.25 smd: 4(3.125,0)
  silkscreen extent -3.25,-3.35 1.95,3.47, body extent -1.85,-3.35 1.85,3.35, height 1.8
VREG-5 [mm] "SOT23, 5-Leads, Body 2.90x2.80mm, Pitch 0.95mm, IPC Medium Density"
  rect 1x0.6 smd: 1(-1.375,0.95) 2(-1.375,0) 3(-1.375,-0.95) 4(1.375,-0.95) 5(1.375,0.95)
  silkscreen extent -1.5,-1.55 0.5,1.92, body extent -0.88,-1.52 0.87,1.53, height 1.45

## Part data
"ARM 20": library part "Header 10X2", "Header, 10-Pin, Dual row"
BNCX BNCY: "BNC Elbow Connector"
C1 C3 C4 C5 C7 C8 C9 C10 C11 C13 C14 C15 C17 C18 C19 C21 C22 C23 C25 C26 C27 C28 C29 C30 C31 C32 C33 C34 C35 C36 C37 C38 C39 C40 C41 C42 C43 C44 C45 C46 C47 C49 C54 C55 C56 C57 C58 C59 C60 C61 C62: library part CMP-1035-00001-1, "CAP 0.5pF 10V ±0.1pF 0603 (1608 Metric) Thickness 1mm SMD"
C2 C6 C12 C16 C20 C24: library part CMP-1036-00001-1, "CAP 0.5pF 10V ±0.1pF 0805 (2012 Metric) Thickness 0.75mm SMD"
C48: library part "Cap Pol3", "Polarized Capacitor (Surface Mount)"
D1: "1 Amp General Purpose Rectifier"
D4 D5: "Typical RED, GREEN, YELLOW, AMBER GaAs LED"
DACX DACY: "Single 16-Bit Voltage Output nanoDAC with SPI Interface, 2.7 to 5.5 V, -40 to +85 degC, RJ-8, Pb-Free, Reel"
EFM32: "EFM32 Giant Gecko, M3 ARM Cortex CPU, 1024 KB Flash, 128 KB RAM, 1.85 - 3.8 V Supply, 48 MHz Max Speed, -40 to 85 degC, 112-Pin BGA, RoHS Compliant"
FPGA: "Spartan-6 LX 1.2V FPGA, 218 User I/Os, 324-Ball Chip-Scale BGA (0.8mm Pitch), Speed Grade 2, Industrial Grade, Pb-Free"
H1 H4: library part "Header 19X2", "Header, 19-Pin, Dual row"
H2 H5: library part "Header 16X2", "Header, 16-Pin, Dual row"
H3 H6: library part "Header 3X2", "Header, 3-Pin, Dual row"
H10 H15: library part "Header 4X2", "Header, 4-Pin, Dual row"
H11: library part "Header 8X2", "Header, 8-Pin, Dual row"
H12 H14 H20 H21: library part "Header 2", "Header, 2-Pin"
H13: library part "Header 2X2", "Header, 2-Pin, Dual row"
H16 H17 H18 H23: library part "Header 3", "Header, 3-Pin"
H19: library part "Header 6X2", "Header, 6-Pin, Dual row"
H24 H25: "Header, 2-Pin, Dual row"
H26 H27 H28 H29: "Header, 2-Pin"
H30: "Header, 3-Pin"
JTAG: "Header, 5-Pin, Dual row"
R1 R2 R3: library part CMP-1012-00001-1, "Jumper 0603 (1608 Metric)"
RES_FPGA RESET_BTN ZOOM_IN ZOOM_OUT: library part switch-button
VREF: "Precision Micropower, Low Dropout Voltage Reference, 5 V Output, 5.1 to 15 V Supply, Industrial, 8-pin SOIC (R-8), Reel"

## Via types
v1: diameter 0.508, hole 0.254, Top Layer to Bottom Layer, 87 vias

## Nets (pads, with @x,y where several pads share a name; then routed paths per layer and width w, separated by ;. In a path a pad name is that pad's centre, name@x,y a point inside that pad or via, vN(x,y) a via of type N, cw(c..) or ccw(c..) an arc to the next point about the centre after c; other vN are vias at no path point)
1.2V: C1.2 C2.2 C3.2 C4.2 C43.2 FPGA.G7 FPGA.H9 FPGA.H11 FPGA.J8 FPGA.J10 FPGA.K9 FPGA.K11 FPGA.L8 FPGA.L10 FPGA.M7 FPGA.M12 VR12.5 | length 0
  Top Layer w0.254: FPGA.H9@76.933,50.857 FPGA.H9@76.943,50.857
3.3V: "ARM 20.1" "EFM HFOSC.4" "EFM LFOSC.4" "FPGA OSC.4" C5.2 C6.2 C7.2 C8.2 C9.2 C10.2 C11.2 C12.2 C13.2 C14.2 C15.2 C16.2 C17.2 C18.2 C19.2 C20.2 C21.2 C22.2 C23.2 C24.2 C25.2 C26.2 C27.2 C28.2 C29.2 C30.2 C31.2 C32.1 C33.1 C34.1 C35.1 C36.1 C41.2 C46.2 C47.2 C54.2 C56.2 C58.2 EFM32.D5 EFM32.D7 EFM32.F8 EFM32.G4 EFM32.G8 EFM32.H7 EFM32.K8 EFM32.K9 EFM32.L4 EFM32.L10 FB.11 FB.33 FLASH1.2 FPGA.B1 FPGA.B5 FPGA.B10 FPGA.B15 FPGA.B17 FPGA.D7 FPGA.D13 FPGA.E2 FPGA.E5 FPGA.E9 FPGA.E10 FPGA.E14 FPGA.E17 FPGA.G4 FPGA.G10 FPGA.G15 FPGA.J2 FPGA.J5 FPGA.J12 FPGA.J14 FPGA.J17 FPGA.K7 FPGA.M4 FPGA.M9 FPGA.M15 FPGA.P5 FPGA.P9 FPGA.P10 FPGA.P14 FPGA.R2 FPGA.R6 FPGA.R12 FPGA.R17 FPGA.U4 FPGA.U9 FPGA.U14 H20.1 H21.2 R1.2 R3.2 SRAM1.11 SRAM1.33 VR33.2 VREF.2 ZOOM_IN.1 ZOOM_IN.3 ZOOM_OUT.1 ZOOM_OUT.3 | length 4.5
  Top Layer w0.254: VREF.2@10.541,56.413 10.922,56.413 ; FPGA.U9@76.943,43.657 76.943,43.387 77.335,42.995 77.335,41.345 v1(77.305,41.315)
  Bottom Layer w0.254: C18.2@76.962,39.889 77.305,40.232 v1(77.305,41.315)
5V: H16.1 PSU.1
A5V: C44.1 C45.1 C62.2 DACX.2 DACY.2 R2.2 VREG5.5
AGND: BNCX.1 BNCY.1 C60.1 C61.1 C62.1 D1.1 D4.2 DACX.5 DACY.5 H24.1 H25.1 H29.2 VREG5.2
CLK: DACX.8 DACY.8 H15.6 | length 1.3
  Bottom Layer w0.254: 27.889,52.502 H15.6@28.829,51.562
DATA_X: DACX.1 H15.2
DATA_Y: DACY.1 H15.4
EBI.A0: EFM32.J4 FPGA.F15 H4.1 | length 48.2
  Top Layer w0.254: v1(81.29,64.475) 81.265,64.475 80.545,63.755 80.545,56.34 80.275,56.07 79.975,56.07 79.755,55.85 79.755,54.68 79.955,54.48 80.26,54.48 80.545,54.195 80.545,53.06 80.725,52.88 81.045,52.88 81.468,52.457 FPGA.F15@81.743,52.457
  Bottom Layer w0.254: H4.1@48.135,66.625 49.21,65.55 80.215,65.55 v1(81.29,64.475)
EBI.A1: EFM32.K3 FPGA.F16 H4.3 | length 6.1
  Top Layer w0.254: FPGA.F16@82.543,52.457 82.543,52.757 82.15,53.15 82.15,55.845 82.355,56.05 82.665,56.05 82.935,56.32 82.935,57.93
EBI.A2: EFM32.L3 FPGA.C17 H4.5 | length 4
  Top Layer w0.254: FPGA.C17@83.343,54.857 83.343,55.133 83.75,55.54 83.75,55.84 83.995,56.085 86.515,56.085
EBI.A3: EFM32.J7 FPGA.C18 H4.7 | length 2.5
  Top Layer w0.254: FPGA.C18@84.143,54.857 86.608,54.857
EBI.A4: EFM32.J8 FPGA.F14 H4.9 | length 6.8
  Top Layer w0.254: 78.94,57.95 78.94,54.73 79.225,54.445 79.49,54.445 79.74,54.195 79.74,53.065 79.95,52.855 80.225,52.855 80.623,52.457 FPGA.F14@80.943,52.457
EBI.A5: EFM32.G10 FPGA.G14 H4.11 | length 58
  Top Layer w0.254: H4.11@60.835,66.625 62.385,68.175 v1(62.385,71.325) ; v1(80.549,51.255) 80.545,51.259 FPGA.G14@80.943,51.657 ; v1(88.25,59.99) 88.25,63.965 v1(88.305,64.02)
  Bottom Layer w0.254: v1(62.385,71.325) 62.665,71.045 78.685,71.045 79.39,71.75 86.075,71.75 87.795,70.03 87.795,66.08 88.305,65.57 v1(88.305,64.02) ; v1(80.549,51.255) 80.549,58.009 80.98,58.44 86.7,58.44 v1(88.25,59.99)
EBI.A6: EFM32.G11 FPGA.D17 H4.13 | length 4.1
  Top Layer w0.254: FPGA.D17@83.343,54.057 83.343,54.343 83.745,54.745 83.745,55.005 84.02,55.28 86.665,55.28
EBI.A7: EFM32.E9 FPGA.D18 H4.15 | length 2.3
  Top Layer w0.254: FPGA.D18@84.143,54.057 86.397,54.057
EBI.A8: EFM32.E10 FPGA.H12 H4.17 | length 8.1
  Top Layer w0.254: v1(78.175,51.255) 78.945,51.255 FPGA.H12@79.343,50.857
  Bottom Layer w0.254: v1(78.175,51.255) 78.175,57.98
EBI.A9: EFM32.F10 FPGA.G13 H4.19 | length 11.6
  Top Layer w0.254: v1(78.96,52.045) 79.51,52.045 79.898,51.657 FPGA.G13@80.143,51.657
  Bottom Layer w0.254: v1(78.96,52.045) 78.96,51.2 79.305,50.855 88.24,50.855
EBI.A10: EFM32.E11 FPGA.E16 H4.21 | length 5
  Top Layer w0.254: FPGA.E16@82.543,53.257 82.562,53.257 v1(82.945,53.64)
  Bottom Layer w0.254: v1(82.945,53.64) 82.945,58.095
EBI.A11: EFM32.A9 FPGA.E18 H4.23 | length 2.3
  Top Layer w0.254: FPGA.E18@84.143,53.257 86.443,53.257
EBI.A12: EFM32.B9 FPGA.K12 H4.25 | length 45
  Top Layer w0.254: v1(77.32,50.44) 77.305,50.425 77.305,49.99 77.6,49.695 77.9,49.695 78.145,49.45 78.145,49.135 78.385,48.895 78.765,48.895 79.127,49.257 FPGA.K12@79.343,49.257 ; H4.25@78.615,66.625 79.59,67.6 v1(79.59,71.215) ; v1(87.4,60.045) v1(87.4,63.995)
  Bottom Layer w0.254: v1(77.32,50.44) 77.35,50.47 77.35,58.055 78.2,58.905 86.26,58.905 v1(87.4,60.045) ; v1(79.59,71.215) 86.075,71.215 87.4,69.89 v1(87.4,63.995)
EBI.A13: EFM32.C9 FPGA.K13 H4.27 | length 96.2
  Top Layer w0.254: FPGA.K13@80.143,49.257 79.872,49.257 79.47,48.855 79.21,48.855 78.96,48.605 78.96,48.335 79.255,48.04 79.61,48.04 79.76,47.89 79.76,47.535 80.04,47.255 80.33,47.255 80.545,47.04 80.545,45.135 80.81,44.87 81.15,44.87 81.385,44.635 81.385,44.295 81.62,44.06 81.905,44.06 82.16,43.805 82.16,43.51 82.425,43.245 84.35,43.245 85.855,41.74 85.855,26.29 87.29,24.855 89.035,24.855 90.91,26.73 90.91,33.205 100.77,43.065 100.77,60.38 94.91,66.24 94.91,67.035 94.3,67.645 82.175,67.645 H4.27@81.155,66.625
EBI.A14: EFM32.D9 FPGA.F17 H4.29 | length 4.2
  Top Layer w0.254: FPGA.F17@83.343,52.457 83.343,52.743 83.745,53.145 83.745,53.45 83.975,53.68 86.705,53.68
EBI.A15: EFM32.D10 FPGA.F18 H4.31 | length 2.1
  Top Layer w0.254: FPGA.F18@84.143,52.457 86.272,52.457
EBI.A16: EFM32.E4 FPGA.H13 H4.33 | length 7.5
  Top Layer w0.254: v1(79.73,51.27) FPGA.H13@80.143,50.857
  Bottom Layer w0.254: v1(79.73,51.27) 79.73,58.185
EBI.A17: EFM32.F1 FPGA.H14 H4.35 | length 8.3
  Top Layer w0.254: v1(80.54,50.445) 80.54,50.454 FPGA.H14@80.943,50.857
  Bottom Layer w0.254: v1(80.54,50.445) 88.27,50.445
EBI.A18: EFM32.F2 FPGA.H15 H4.37 | length 33.6
  Top Layer w0.254: FPGA.H15@81.743,50.857 81.743,51.067 81.34,51.47 81.34,51.825 81.1,52.065 79.985,52.065 79.74,52.31 79.74,52.6 79.48,52.86 79.21,52.86 78.945,53.125 78.945,54.185 78.655,54.475 78.335,54.475 78.145,54.665 78.145,55.815 77.91,56.05 77.595,56.05 77.335,56.31 77.335,63.66 78.725,65.05 92.28,65.05 H4.37@93.855,66.625
EBI.A19: EFM32.F3 FPGA.H16 | length 5.5
  Top Layer w0.254: FPGA.H16@82.543,50.857 82.543,51.143 82.935,51.535 82.935,51.83 83.18,52.075 83.54,52.075 83.735,52.27 83.735,52.65 83.96,52.875 86.6,52.875
EBI.A20: EFM32.F4 FPGA.G16 | length 6.5
  Top Layer w0.254: FPGA.G16@82.543,51.657 82.543,51.943 82.945,52.345 v1(82.945,52.825)
  Bottom Layer w0.254: v1(82.945,52.825) 88.085,52.825
EBI.A21: EFM32.G1 FPGA.G18 | length 1.3
  Top Layer w0.254: FPGA.G18@84.143,51.657 85.482,51.657
EBI.A22: EFM32.G2 FPGA.J13 | length 12.6
  Top Layer w0.254: v1(78.145,50.45) 79.75,50.45 FPGA.J13@80.143,50.057
  Bottom Layer w0.254: v1(78.145,50.45) 79.795,50.45 80.33,49.915 80.985,49.915 81.23,50.16 88.31,50.16
EBI.CS0: EFM32.D6
EBI.CS1: EFM32.A5 FPGA.N18 H6.6 | length 1.4
  Top Layer w0.254: FPGA.N18@84.143,46.857 85.567,46.857
EBI.D0: EFM32.B4 FPGA.K14 H5.2 | length 12.1
  Top Layer w0.254: v1(78.945,49.67) 80.53,49.67 FPGA.K14@80.943,49.257
  Bottom Layer w0.254: v1(78.945,49.67) 80.405,48.21 88.32,48.21
EBI.D1: EFM32.A4 FPGA.L12 H5.4 | length 13
  Top Layer w0.254: FPGA.L12@79.343,48.457 79.562,48.457 79.975,48.87 81.125,48.87 81.36,49.105 81.36,50.25 81.585,50.475 81.88,50.475 82.145,50.74 82.145,52.63 81.9,52.875 81.525,52.875 81.31,53.09 81.31,54.25 81.085,54.475 80.76,54.475 80.555,54.68 80.555,55.875 80.76,56.08 81.08,56.08 81.325,56.325 81.325,57.795
EBI.D2: EFM32.C3 FPGA.L13 H5.6 | length 8.8
  Top Layer w0.254: FPGA.L13@80.143,48.457 80.143,48.452 80.545,48.05 80.545,47.57 80.865,47.25 81.09,47.25 81.36,46.98 81.36,45.9 81.595,45.665 81.97,45.665 82.14,45.495 82.14,45.105 82.4,44.845 82.76,44.845 82.965,44.64 82.965,44.225 83.125,44.065 85.775,44.065